# Altium PCB demoBoard.PcbDoc
Units mil, origin at the board's own origin, x right, y up, seen from the top; angles counter-clockwise.
Board outline 975 x 1735 mil, 2 copper layers (Top Layer, Bottom Layer); 23 components, 27 nets, 134 pads, 122 vias.
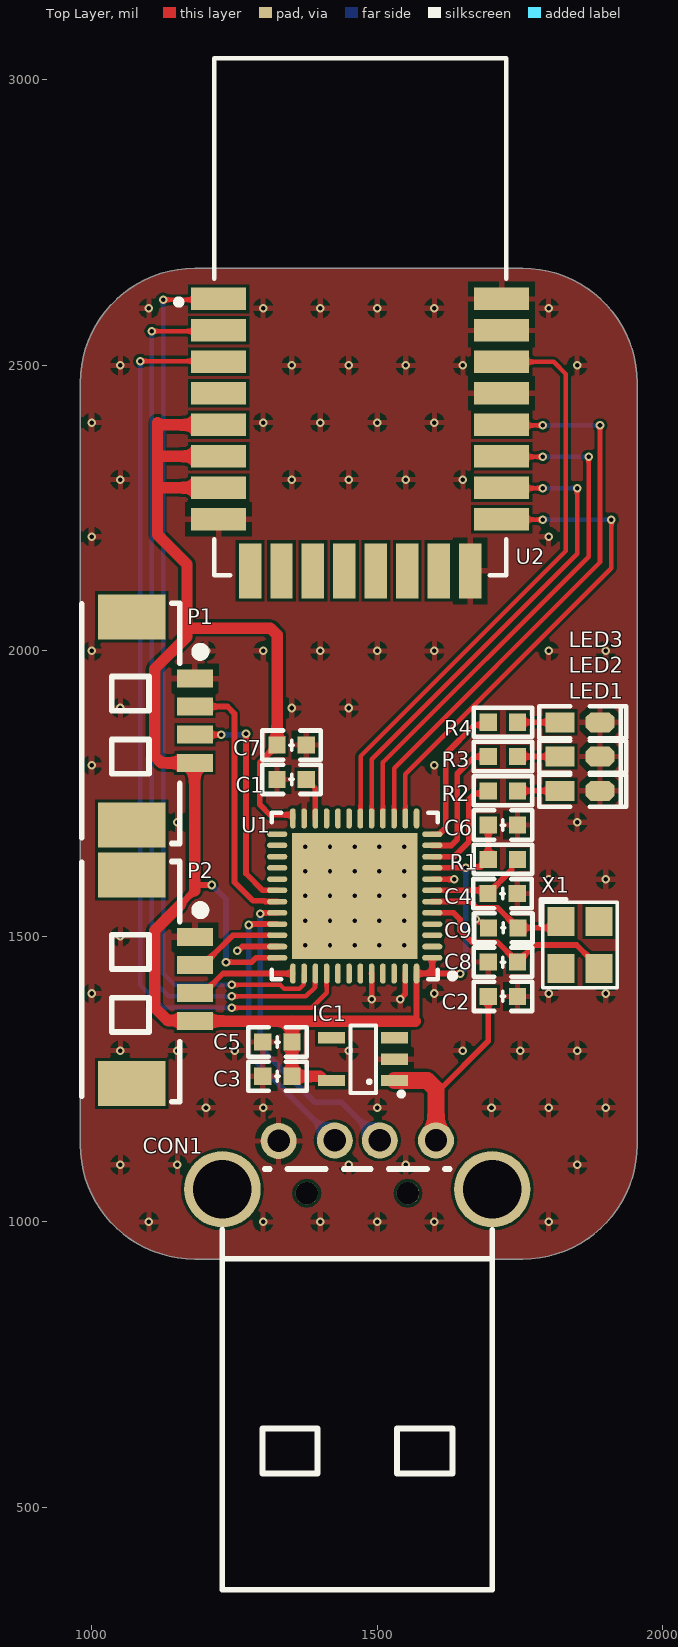
[diagram p0: Top Layer view]
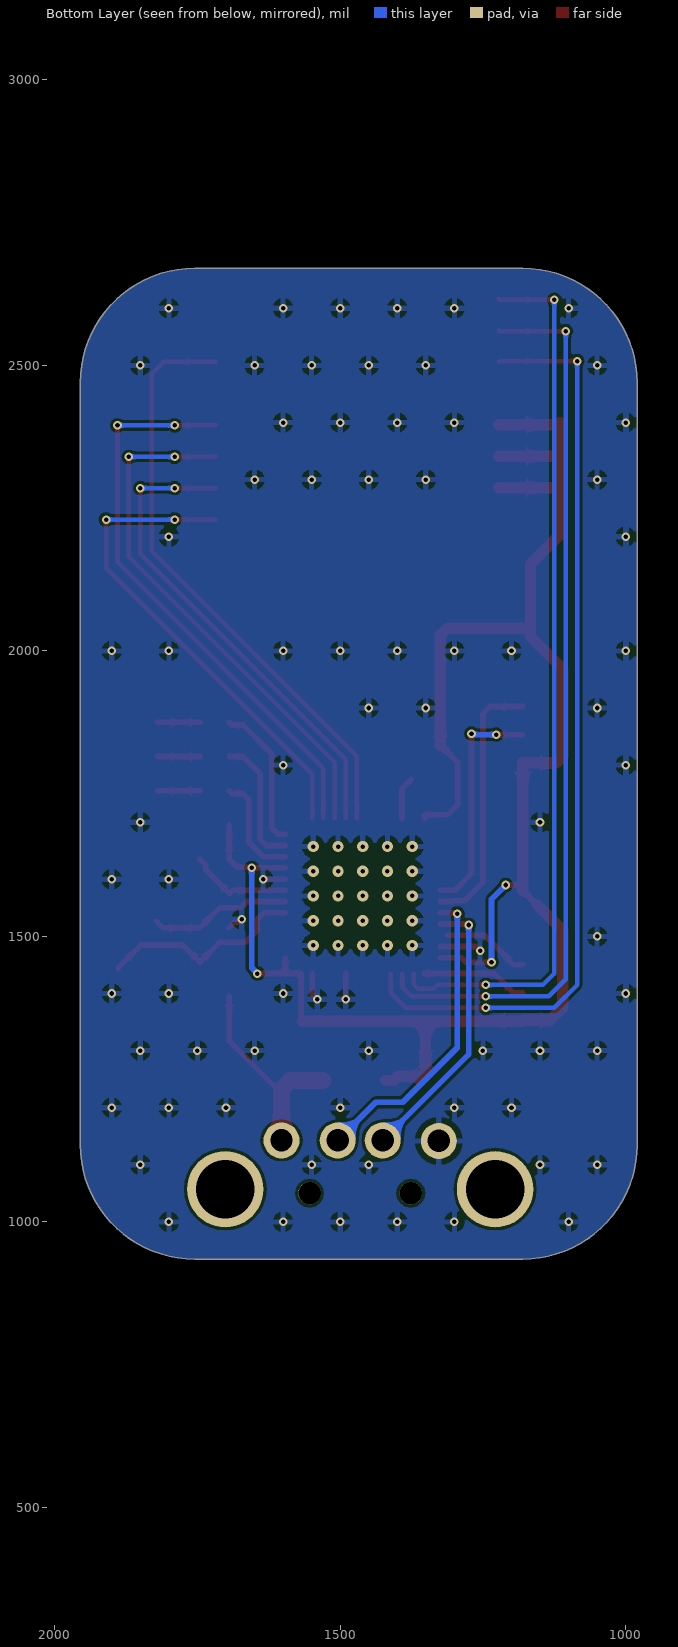
[diagram p1: Bottom Layer view, seen from below]
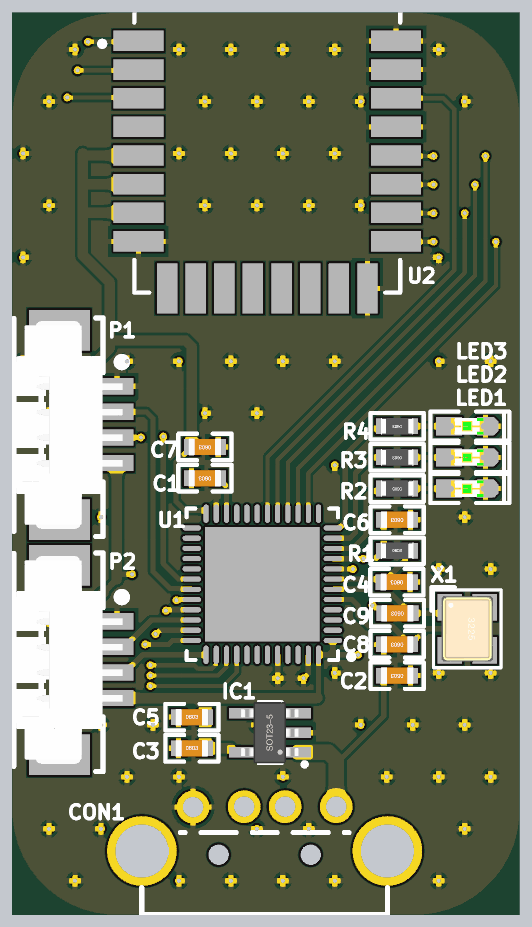
[diagram p2: 3D render of the assembled board from above, using the file's embedded part models]

## Layer stack, top to bottom
Top Solder: solder mask 0.4, Solder Resist, Dk 3.5
Top Layer: signal copper 1.4
Dielectric 1: dielectric 12.6, FR-4, Dk 4.8
Bottom Layer: signal copper 1.4
Bottom Solder: solder mask 0.4, Solder Resist, Dk 3.5

## Board outline
980,1135 ccw(c1180,1135) 1180,935 1755,935 ccw(c1755,1135) 1955,1135 1955,2470 ccw(c1755,2470) 1755,2670 1180,2670 ccw(c1180,2470) 980,2470

## Design rules (kind name [scope] priority, off if disabled: settings)
Clearance [All] p1: gap=5 ignorepadtopadclearanceinfootprint=TRUE
HoleSize [All] p1: absolutevalues=TRUE maxlimit=1000 minlimit=1 maxpercent=80.000 minpercent=20.000
MinimumSolderMaskSliver [All] p1: minsoldermaskwidth=0
NetAntennae [All] p1 off: netantennaetolerance=0
PolygonConnect [All] p1: connectstyle=Relief reliefconductorwidth=10 reliefentries=4 polygonreliefangle="90 Angle" airgapwidth=10
RoutingVias [All] p1: holewidth=28 width=50 viastyle="Through Hole" minholewidth=28 minwidth=50 maxholewidth=28 maxwidth=50
SilkToSilkClearance [All] p1: silktosilkclearance=0
SilkToSolderMaskClearance [IsPad] p1: minsilkscreentomaskgap=0 clearancetoexposedcopper=TRUE
SolderMaskExpansion [All] p1: expansion=4 istentingtop=FALSE
Width [All] p1: maxlimit=50 minlimit=5 preferedwidth=10
25 further rules are at their usual default settings.

## Components (designator, comment, footprint, x,y, rotation, side; value= is the part's Value field where it differs from the comment)
C1 "2.2uF" "C 0603_L" 1350,1775 r180 top
C2 "1uF" "C 0603_L" 1720,1395 r180 top
C3 "1uF" "C 0603_L" 1325,1255 r0 top
C4 "100nF" "C 0603_L" 1719.41,1575 r180 top
C5 "100nF" "C 0603_L" 1325,1315 r0 top
C6 "100nF" "C 0603_L" 1720,1695 r180 top
C7 "100nF" "C 0603_L" 1350,1835 r180 top
C8 "12pF" "C 0603_L" 1720,1455 r180 top
C9 "12pF" "C 0603_L" 1720.59,1515 r180 top
CON1 "AM90" USB-AM-TH_AM90 1465,1100 r0 top
IC1 "LM8805(SOT-23)" SOT23-5N 1475,1285 r90 top
LED1 "红色" "LED 0603G" 1855,1754.74 r0 top
LED2 "红色" "LED 0603G" 1855,1814.74 r0 top
LED3 "红色" "LED 0603G" 1855,1874.74 r0 top
P1 "Header 4" "MX 1.25-WS-4P" 1070,1877.36 r270 top
P2 "Header 4" "MX 1.25-WS-4P" 1070,1425 r270 top
R1 "10K" "R 0603_L" 1720,1635 r0 top
R2 "10K" "R 0603_L" 1720,1755 r180 top
R3 "10K" "R 0603_L" 1720,1815 r180 top
R4 "10K" "R 0603_L" 1720,1875 r180 top
U1 "STM32F401CCU6" STM-UFQFPN48_N 1460.47,1570.83 r180 top
U2 "DWM1000" DECW-DWM1000-24_V 1470,2585 r0 top
X1 "16M" "OSC 3225-4P" 1855,1485 r270 top

## Footprints (in the part's own frame and the unit in brackets; to place one, negate y for a bottom-side part, rotate by r counter-clockwise, add the part's x,y. Pads: shape width x height; smd on the part's side, far side on the other; paste and mask are expansions set on the pad)
"C 0603_L" [mil] "无极性贴片电容"
  rect 30x30 smd: 1(-25.59,0) 2(25.59,0)
  silkscreen extent -51,-26 51,26, body extent -31,-16 31,16, height 32
DECW-DWM1000-24_V [mm] "SMD, 24-Leads, Body 23x13mm, Pitch 1.4mm"
  rect 2.45x1 smd: 1(-6.295,0.8) 2(-6.295,-0.6) 3(-6.295,-2) 4(-6.295,-3.4) 5(-6.295,-4.8) 6(-6.295,-6.2) 7(-6.295,-7.6) 8(-6.295,-9) 17(6.295,-9) 18(6.295,-7.6) 19(6.295,-6.2) 20(6.295,-4.8) 21(6.295,-3.4) 22(6.295,-2) 23(6.295,-0.6) 24(6.295,0.8)
  rect 1x2.45 smd: 9(-4.9,-11.295) 10(-3.5,-11.295) 11(-2.1,-11.295) 12(-0.7,-11.295) 13(0.7,-11.295) 14(2.1,-11.295) 15(3.5,-11.295) 16(4.9,-11.295)
  silkscreen extent -8.19,-11.5 6.5,11.5, body extent -6.5,-11.5 6.5,11.5, height 4
"LED 0603G" [mil] "绿色0603LED"
  rect 50x35 smd: 1(-35,0.26)
  oct 50x35 smd: 2(35,0.26)
  silkscreen extent -71,-28 81,28, body extent -31,-16 32,16, height 18
"MX 1.25-WS-4P" [mm] "长：10.15mm，宽：4.2mm，高：3.4mm"
  rect 2x3 smd: 0(-4.632,0) 0(4.632,0)
  rect 0.8x1.6 smd: 1(-1.889,2.811) 2(-0.639,2.811) 3(0.611,2.811) 4(1.861,2.811)
  silkscreen extent -5.23,-2.23 5.45,3.25, body extent -5.07,-2.1 5.07,3.09, height 3.4
"OSC 3225-4P" [mm] "3.2*2.5*0.7mm(长宽高)"
  rect 1.3x1.2 smd: 1(-1.05,-0.85) 2(1.05,-0.85) 3(1.05,0.85) 4(-1.05,0.85)
  silkscreen extent -2.03,-1.75 1.91,1.65, body extent -1.6,-1.25 1.6,1.25, height 0.7
"R 0603_L" [mil] "1/10W贴片电阻"
  rect 30x30 smd: 1(-25.59,0) 2(25.59,0)
  silkscreen extent -51,-26 51,26, body extent -31,-16 32,16, height 16
SOT23-5N [mm] "3x1.6x1.1mm(长宽高)"
  rect 0.5x1.2 smd: 1(-0.95,-1.4) 2(0,-1.4) 3(0.95,-1.4) 4(0.95,1.4) 5(-0.95,1.4)
  silkscreen extent -1.63,-1.78 1.5,0.56, body extent -1.5,-1.4 1.5,1.4, height 1.15
STM-UFQFPN48_N [mm] "QFN, 48-Leads, Body 7.1x7.1mm, Pitch 0.5mm, Thermal Pad 5.6x5.6mm, IPC Medium Density"
  oval 0.9x0.25 smd: 1(-3.45,2.75) 2(-3.45,2.25) 3(-3.45,1.75) 4(-3.45,1.25) 5(-3.45,0.75) 6(-3.45,0.25) 7(-3.45,-0.25) 8(-3.45,-0.75) 9(-3.45,-1.25) 10(-3.45,-1.75) 11(-3.45,-2.25) 12(-3.45,-2.75) 25(3.45,-2.75) 26(3.45,-2.25) 27(3.45,-1.75) 28(3.45,-1.25) 29(3.45,-0.75) 30(3.45,-0.25) 31(3.45,0.25) 32(3.45,0.75) 33(3.45,1.25) 34(3.45,1.75) 35(3.45,2.25) 36(3.45,2.75)
  oval 0.25x0.9 smd: 13(-2.75,-3.45) 14(-2.25,-3.45) 15(-1.75,-3.45) 16(-1.25,-3.45) 17(-0.75,-3.45) 18(-0.25,-3.45) 19(0.25,-3.45) 20(0.75,-3.45) 21(1.25,-3.45) 22(1.75,-3.45) 23(2.25,-3.45) 24(2.75,-3.45) 37(2.75,3.45) 38(2.25,3.45) 39(1.75,3.45) 40(1.25,3.45) 41(0.75,3.45) 42(0.25,3.45) 43(-0.25,3.45) 44(-0.75,3.45) 45(-1.25,3.45) 46(-1.75,3.45) 47(-2.25,3.45) 48(-2.75,3.45)
  rect 5.6x5.6 smd: 49(0,0)
  silkscreen extent -4.48,-3.7 3.7,3.7, body extent -3.55,-3.55 3.55,3.55, height 0.6
USB-AM-TH_AM90 [mm]
  round 1.6 hole 1: 1(3.5,1.085) 2(1,1.084) 3(-1,1.084) 4(-3.5,1.062)
  round 3.4 hole 2.6: MH1(6,-1.085) MH2(-6,-1.085)
  round 1 hole 1 unplated: ""(-2.25,-1.266) ""(2.25,-1.266)
  silkscreen extent -6.01,-18.9 6.01,-0.18

## Part data
C1 C2 C3 C4 C5 C6 C7 C8 C9: library part C, "无极性贴片电容", BOM名称=无极性贴片电容, 学习资源=www.ooocke.com, 材质=X7R, 版权归属=源创客
IC1: "600mA CMOS L.D.O. Regulator"
LED1 LED2 LED3: library part LED-SMD, "贴片LED", BOM名称=贴片LED, 学习资源=www.ooocke.com, 版权归属=源创客
P1 P2: "Header, 4-Pin", LatestRevisionDate=17-Jul-2002, LatestRevisionNote="Re-released for DXP Platform.", Publisher="Altium Limited"
R1 R2 R3 R4: library part R, "贴片电阻", BOM名称=贴片电阻, 学习资源=www.ooocke.com, 版权归属=源创客
U1: library part CMP-0243-00119-2, "ARM Cortex-M4 32-bit MCU+FPU, 105 DMIPS, 256 kB Flash, 64 kB Internal RAM, 36 I/Os, 48-pin UFQFPN, -40 to 85 degC, Tray", I/Os (High Current)=36, Manufacturer=STMicroelectronics, Operating Frequency(F) (Processor speed) (MHz)=84, Supply Voltage(Vcc) max (V)=3.6, Supply Voltage(Vcc) min (V)=1.8, ComponentLink1Description="Manufacturer URL", ComponentLink1URL=http://www.st.com/web/en/home.html, ComponentLink2Description=Datasheet, ComponentLink2URL=http://www.st.com/st-web-ui/static/active/en/resource/technical/document/data_brief/DM00071938.pdf, ComponentLink3Description="Package Specification", ComponentLink3URL=http://www.st.com/st-web-ui/static/active/en/resource/technical/document/data_brief/DM00071938.pdf, Core="ARM Cortex-M4", DatasheetVersion="Rev. 1", FLASH Size (Prog) (kB)=256, Internal RAM Size (kB)=64, Mounting Technology="Surface Mount", PackageDescription="48-Pin Ultra Thin Fine Pitch Quad Flat No-Lead, 7 x 7 x 0.6 mm Body, 0.5 mm Pitch, Exposed Pad", PackageReference=UFQFPN48, PackageVersion="Rev. 1, 04/2013", Packing=Tray, PartNumber=STM32F401CCU6
U2: library part CMP-2000-05094-1, "DW M1000 IEEE 802.15.4 -2011 UWB Transceiver Module", Current - Receiving=64mA, Current - Transmitting=31mA, Frequency=3.5GHz~6.5GHz, Manufacturer=Decawave, Operating Temperature=-40degC~85degC, Package / Case=Module, Power - Output=-, Standard Package=500, Voltage - Supply=2.8V~3.6V, Antenna Type=Integrated,Chip, Category=RF/IFandRFID, Data Rate=6.8Mbps, Datasheet URL=http://www.decawave.com/sites/default/files/resources/dwm1000-datasheet-v1.3.pdf, Datasheet Version="Rev. V1.0, 12/2015", Design Resources=DevelopmentToolSelector, Family=RFTransceiverModules, Featured Product=ScenSorDWM1000Module, Manufacturer URL=http://www.decawave.com/, Memory Size=-, Modulation=BPM,BPSK, Mounting Type=SurfaceMount, Online Catalog=ScenSorDWM1000Module, Other Names=1479-1002-2RUPF-G001A, Packaging=Tape&Reel(TR), Protocol=IR-UWB, RF Family/Standard=802.15.4, Sensitivity=-, Serial Interfaces=SPI, Series=-
X1: library part XTAL-4P, "4脚无源晶振", BOM名称=4脚无源晶振, 学习资源=www.ooocke.com, 版权归属=源创客, 负载电容=CL12pF

## Via types
v1: diameter 15, hole 8, Top Layer to Bottom Layer, 97 vias
v2: diameter 19.68, hole 7.87, Top Layer to Bottom Layer, 25 vias

## Nets (pads, with @x,y where several pads share a name; then routed paths per layer and width w, separated by ;. In a path a pad name is that pad's centre, name@x,y a point inside that pad or via, vN(x,y) a via of type N, cw(c..) or ccw(c..) an arc to the next point about the centre after c; other vN are vias at no path point)
3V3: C3.2 C5.2 C6.2 C7.2 IC1.5 P1.4 P2.4 R1.1 U1.1 U1.9 U1.24 U1.36 U1.48 U2.5 U2.6 U2.7 | length 3456
  Top Layer w10: 1155,1555 1180,1580 ; 1190,1590 v1(1210,1590) ; v1(1235,1455) 1280,1455 1287.56,1462.56 U1.36 ; C7.2 1294.14,1804.73 1294.14,1730.86 1312.13,1712.87 1352.13,1712.87 1352.2,1712.8 U1.24 ; 1566.72,1351.72 1568.74,1353.74 U1.48 1596.3,1435 ; U1.1 1596.3,1435 ; U1.9 v1(1655,1620) 1655.96,1620.96 1680.37,1620.96 R1.1 C6.2 ; v1(1645,1435) 1596.3,1435
  Top Layer w20: 1124.21,2285.79 U2.7 ; 1155,1555 1110,1510 1110,1375.39 1132.32,1353.07 1179.31,1353.07 P2.4 1350.59,1351.72 ; 1180,1580 P1.4@1180,1804.09 ; P1.4 P1.4@1180,1804.09 ; U2.6 1115.91,2340.91 1115,2340 ; U2.5 1118.98,2396.02 1115,2400 1115,2340 ; C7.2 1324.41,2028.28 1312.7,2040 1166.72,2040 ; IC1.5 1406.42,1247.6 1399.02,1255 C3.2 C5.2 1350.59,1351.72 ; 1566.72,1351.72 1350.59,1351.72 ; 1115,2340 1115,2203.36 1166.72,2151.64 1166.72,2040 ; 1166.72,2040 1166.72,2025 1110,1968.28 1110,1815.8 1121.72,1804.09 P1.4@1180,1804.09
  Bottom Layer w10: v1(1210,1590) 1235,1565 v1(1235,1455) ; v1(1645,1435) 1655,1445 v1(1655,1620)
GND: C1.2 C2.1 C3.1 C4.1 C5.1 C6.1 C7.1 C8.2 C9.2 CON1.4 IC1.2 LED1.2 LED2.2 LED3.2 P1.1 P2.1 U1.8 U1.23 U1.35 U1.44 U1.47 U1.49 U2.8 U2.16 U2.21 U2.23 U2.24 | length 234.3
  Top Layer w10: v1(1255,1475) 1256.35,1475 1263.6,1482.24 U1.35 ; U1.44 1490.08,1434.92 1490.08,1389.92 v1(1490.22,1389.78) ; v1(1540,1390) 1549.06,1399.06 U1.47 ; U1.8 1596.38,1600.28 1634.72,1600.28 v1(1635,1600) ; v1(1672.5,1530) 1673.85,1530 1678.85,1525 1685,1525 C9.2
  other v1: 1100,1000 1300,1000 1400,1000 1500,1000 1600,1000 1800,1000 1050,1100 1150,1100 1450,1100 1550,1100 1850,1100 1200,1200 1300,1200 1500,1200 1700,1200 1800,1200 1900,1200 1050,1300 1150,1300 1250,1300 1450,1300 1650,1300 1750,1300 1850,1300 1000,1400 1600,1400 1800,1400 1900,1400 1050,1500 1800,1600 1900,1600 1150,1700 1850,1700 1000,1800 1600,1800 1050,1900 1350,1900 1450,1900 1000,2000 1200,2000 1300,2000 1400,2000 1500,2000 1600,2000 1800,2000 1900,2000 1000,2200 1800,2200 1050,2300 1350,2300 1450,2300 1550,2300 1650,2300 1000,2400 1300,2400 1400,2400 1500,2400 1600,2400 1050,2500 1350,2500 1450,2500 1550,2500 1650,2500 1850,2500 1100,2600 1300,2600 1400,2600 1500,2600 1600,2600 1800,2600
  other v2: 1373.86,1484.21 1417.17,1484.21 1460.47,1484.21 1503.78,1484.21 1547.09,1484.21 1373.86,1527.52 1417.17,1527.52 1460.47,1527.52 1503.78,1527.52 1547.09,1527.52 1373.86,1570.83 1417.17,1570.83 1460.47,1570.83 1503.78,1570.83 1547.09,1570.83 1373.86,1614.13 1417.17,1614.13 1460.47,1614.13 1503.78,1614.13 1547.09,1614.13 1373.86,1657.44 1417.17,1657.44 1460.47,1657.44 1503.78,1657.44 1547.09,1657.44
LED_0: R2.2 U1.10 | length 189.8
  Top Layer w10: U1.10 1634.72,1639.72 1660,1665 1660,1740 1670.27,1750.27 1689.68,1750.27 R2.2
LED_1: R3.2 U1.11 | length 229.9
  Top Layer w10: U1.11 1629.41,1659.41 1640,1670 1640,1785 1670,1815 R3.2
LED_2: R4.2 U1.12 | length 255.4
  Top Layer w10: U1.12 1609.09,1679.09 1620,1690 1620,1820 1670.27,1870.27 1689.68,1870.27 R4.2
NetLED1_1: LED1.1 R2.1 | length 74.4
  Top Layer w10: R2.1 LED1.1
NetLED2_1: LED2.1 R3.1 | length 74.4
  Top Layer w10: R3.1 LED2.1
NetLED3_1: LED3.1 R4.1 | length 74.4
  Top Layer w10: R4.1 LED3.1
NRST: C4.2 R1.2 U1.7 | length 181.3
  Top Layer w10: U1.7 1688.15,1580.67 C4.2 1735.59,1616.77 1735.59,1625 R1.2
OSC_IN: C8.1 U1.5 X1.3 | length 369.8
  Top Layer w10: U1.5 1633.7,1541.3 1645,1530 1645,1510.86 1665.86,1490 1710.6,1490 C8.1 1775.59,1485 1849.09,1485 1888.46,1445.63 X1.3
OSC_OUT: C9.1 U1.6 X1.1 | length 249
  Top Layer w10: U1.6 1663.69,1560.98 1674.68,1550 1711.18,1550 C9.1 1810.2,1515 X1.1
SWCLK: P2.3 U1.37 | length 185.9
  Top Layer w10: P2.3 1196.4,1400.94 1207.15,1411.69 1207.15,1412.15 1230,1435 U1.37
SWDIO: P2.2 U1.34 | length 153.4
  Top Layer w10: P2.2 1196.4,1450.15 1207.15,1460.9 1207.15,1462.15 1246.85,1501.85 U1.34@1311.93,1501.85
USART1_RX: P1.2 U1.31 | length 458.3
  Top Layer w10: P1.2 1237.49,1902.51 1250,1890 1250,1595 1282.5,1562.5 1302.25,1562.5 1303.69,1561.06 1324.57,1561.06 U1.31
USART1_TX: P1.3 U1.30 | length 401.8
  Top Layer w10: P1.3 v1(1226.95,1853.3) ; v1(1270,1855) 1270,1610 1299.33,1580.67 U1.30
  Bottom Layer w10: v1(1226.95,1853.3) 1266.95,1853.3 1268.65,1855 v1(1270,1855)
USB_DM: CON1.2 U1.32 | length 541.8
  Top Layer w10: v1(1295,1540) 1296.35,1540 1297.57,1541.22 1324.57,1541.22 U1.32
  Bottom Layer w10: v1(1295,1540) 1295,1305 1390.49,1209.51 1437.55,1209.51 CON1.2
USB_DP: CON1.3 U1.33 | length 490
  Top Layer w10: v1(1275,1520) 1276.35,1520 1277.97,1521.61 U1.33
  Bottom Layer w10: v1(1275,1520) 1275,1293.32 CON1.3
UWB_CLK: U1.15 U2.20 | length 1010.3
  Top Layer w8: U1.15 1529.37,1794.37 1890,2155 v1(1890,2395) ; U2.20 1718.86,2395 v1(1790,2395)
  Bottom Layer w8: v1(1790,2395) v1(1890,2395)
UWB_CS: U1.14 U2.17 | length 865.3
  Top Layer w8: U1.14 1549.06,1784.06 1910,2145 v1(1910,2230) ; U2.17 1718.5,2230 v1(1790,2230)
  Bottom Layer w8: v1(1790,2230) v1(1910,2230)
UWB_EXTON: U1.38 U2.1 | length 1557.7
  Top Layer w8: v1(1125,2615) 1220.67,2615 U2.1 ; v1(1245,1415) 1330,1415 1337,1408 1363,1408 1371.54,1416.54 1371.54,1434.65 U1.38
  Bottom Layer w8: v1(1125,2615) 1125,1435 1145,1415 v1(1245,1415)
UWB_IRQ: U1.18 U2.22 | length 1048.3
  Top Layer w8: U1.18 1470.67,1707.01 1470.67,1815.67 1830,2175 1830,2485 1808.74,2506.26 U2.22
UWB_MISO: U1.16 U2.19 | length 935.1
  Top Layer w8: U1.16 1509.68,1804.68 1870,2165 v1(1870,2340) ; U2.19 1718.74,2340 v1(1790,2340)
  Bottom Layer w8: v1(1790,2340) v1(1870,2340)
UWB_MOSI: U1.17 U2.18 | length 860
  Top Layer w8: U1.17 1490,1810 1850,2170 v1(1850,2285) ; U2.18 1718.62,2285 v1(1790,2285)
  Bottom Layer w8: v1(1790,2285) v1(1850,2285)
UWB_RST: U1.40 U2.3 | length 1617.9
  Top Layer w8: v1(1085,2507.68) 1220.75,2507.68 U2.3 ; v1(1245,1375) 1385,1375 1411.26,1401.26 U1.40
  Bottom Layer w8: v1(1085,2507.68) 1085,1415 1125,1375 v1(1245,1375)
UWB_WAKEUP: U1.39 U2.2 | length 1582
  Top Layer w8: v1(1105,2560) 1220.79,2560 U2.2 ; v1(1245,1395) 1375,1395 1391.22,1411.22 1391.22,1434.65 U1.39
  Bottom Layer w8: v1(1105,2560) 1105,1425 1135,1395 v1(1245,1395)
VCAP1: C1.1 U1.22 | length 75
  Top Layer w10: C1.1 1391.57,1759.02 U1.22
VCC: C2.2 CON1.1 IC1.1 | length 371.4
  Top Layer w10: 1606.38,1228.62 1694.41,1316.66 C2.2
  Top Layer w30: IC1.1 1587.4,1247.6 1602.79,1232.21 CON1.1
pads on no net: CON1. CON1.MH1 CON1.MH2 IC1.3 IC1.4 P1.0 P2.0 U1.2 U1.3 U1.4 U1.13 U1.19 U1.20 U1.21 U1.25 U1.26 U1.27 U1.28 U1.29 U1.41 U1.42 U1.43 U1.45 U1.46 U2.4 U2.9 U2.10 U2.11 U2.12 U2.13 U2.14 U2.15 X1.2 X1.4

## Polygon pours and split planes (outlines as drawn)
GND on Bottom Layer "GND_L02_P001" (solid, pour order 1): 980,1135 ccw(c1180,1135) 1180,935 1755,935 ccw(c1755,1135) 1955,1135 1955,2470 ccw(c1755,2470) 1755,2670 1180,2670 ccw(c1180,2470) 980,2470
GND on Top Layer "GND_L01_P000" (solid, pour order 0): 980,1135 ccw(c1180,1135) 1180,935 1755,935 ccw(c1755,1135) 1955,1135 1955,2470 ccw(c1755,2470) 1755,2670 1180,2670 ccw(c1180,2470) 980,2470

## Silkscreen, mask and mechanical layers (free items; w line width, h text height)
Mechanical 1:
  the board outline again, w10